# EAGLE board 32IV 6 LCD menu (EAGLE 9.7.0)

Size 138.18 x 123.5 mm. Coordinates in mm from the lower left corner, seen from the top.
Outline: 0,0 138.18,0 138.18,123.5 0,123.5 0,0
Copper layers (1*16): Top 0.035mm / dielectric 1.5mm / Bottom 0.035mm
Design rules "default": minimum track width 6mil, minimum drill 0.35mm, track to track 6mil, track to pad 6mil, pad to pad 6mil, via to via 6mil, smd to smd 6mil, copper to edge 40mil, drill to drill 6mil, minimum pad ring 10mil, minimum via ring 8mil, stop-mask expansion 4mil, vias tented up to drill 0mil, thermal gap 10mil

## Footprints (pad centres in the part's own frame; a part is rotated, then mirrored left to right if it is on the bottom)
RESAD1016W63L850D250B = drill 0.83 pad 1.43: 1 -5.08,0; 2 5.08,0
SWITCH-MOMENTARY-PTH-6.5MM = drill 1.016 pad 1.88: 1 -3.251,2.261; 2 3.251,2.261; 3 -3.251,-2.261; 4 3.251,-2.261
JHD-162A = drill 1.016 long: 1 -19.05,0; 2 -16.51,0; 3 -13.97,0; 4 -11.43,0; 5 -8.89,0; 6 -6.35,0; 7 -3.81,0; 8 -1.27,0; 9 1.27,0; 10 3.81,0; 11 6.35,0; 12 8.89,0; 13 11.43,0; 14 13.97,0; 15 16.51,0; 16 19.05,0
ARDUINO-UNO-R3-SHIELD = drill 1.016 pad 1.88: 3.3V 24.13,-2.54; 5V 24.13,0; A0 24.13,12.7; A1 24.13,15.24; A2 24.13,17.78; A3 24.13,20.32; A4 24.13,22.86; A5 24.13,25.4; AREF -24.13,-13.97; D2 -24.13,20.32; D3 -24.13,17.78; D4 -24.13,15.24; D5 -24.13,12.7; D6 -24.13,10.16; D7 -24.13,7.62; D8 -24.13,3.81; D9 -24.13,1.27; D10 -24.13,-1.27; D11 -24.13,-3.81; D12 -24.13,-6.35; D13 -24.13,-8.89; GND@0 24.13,2.54; GND@1 24.13,5.08; GND@2 -24.13,-11.43; IOREF 24.13,-7.62; NC 24.13,-10.16; RES 24.13,-5.08; RX -24.13,25.4; SCL -24.13,-19.05; SDA -24.13,-16.51; TX -24.13,22.86; VIN 24.13,7.62

## Placement (x,y rotation side)
R1  220  [RESAD1016W63L850D250B]  79.44,114.53 90 top
R2  220  [RESAD1016W63L850D250B]  129.21,45.38 0 top
R3  220  [RESAD1016W63L850D250B]  129.21,35.22 0 top
R4  220  [RESAD1016W63L850D250B]  129.21,25.06 0 top
R5  220  [RESAD1016W63L850D250B]  129.21,14.9 0 top
S1  SWITCH_MOMENTARY  [SWITCH-MOMENTARY-PTH-6.5MM]  110.16,42.84 0 top
S2  SWITCH_MOMENTARY  [SWITCH-MOMENTARY-PTH-6.5MM]  110.16,32.68 0 top
S3  SWITCH_MOMENTARY  [SWITCH-MOMENTARY-PTH-6.5MM]  110.16,22.52 0 top
S4  SWITCH_MOMENTARY  [SWITCH-MOMENTARY-PTH-6.5MM]  110.16,12.36 0 top
U3  LCD-16X2JHD-162A  [JHD-162A]  60.39,99.41 0 top
U8  ARDUINO-UNO-R3-SHIELD  [ARDUINO-UNO-R3-SHIELD]  47.88,29.84 270 top

## Library data of the parts
R1-R5 S1-S4 U3 U8 = Tinkercad

## Nets
U3_LED-: R1.1 U3.16
U8_5V: S1.3 S1.4 S2.3 S2.4 S3.3 S3.4 S4.3 S4.4 U3.2 U3.15 U8.5V
U8_D4: R5.1 S4.1 S4.2 U8.D4
U8_D5: R4.1 S3.1 S3.2 U8.D5
U8_D6: R3.1 S2.1 S2.2 U8.D6
U8_D7: R2.1 S1.1 S1.2 U8.D7
U8_D8: U3.14 U8.D8
U8_D9: U3.13 U8.D9
U8_D10: U3.12 U8.D10
U8_D11: U3.11 U8.D11
U8_D12: U3.6 U8.D12
U8_D13: U3.4 U8.D13
U8_GND: R1.2 R2.2 R3.2 R4.2 R5.2 U3.1 U3.3 U3.5 U8.GND@0 U8.GND@1 U8.GND@2

## Tracks (layer width: path | path; a pad name or v marks a point on that pad's centre or on a via)
U3_LED-  (1 unrouted)
U8_5V  (10 unrouted)
U8_D4  (3 unrouted)
U8_D5  (3 unrouted)
U8_D6  (3 unrouted)
U8_D7  (3 unrouted)
U8_D8  (1 unrouted)
U8_D9  (1 unrouted)
U8_D10  (1 unrouted)
U8_D11  (1 unrouted)
U8_D12  (1 unrouted)
U8_D13  (1 unrouted)
U8_GND  (10 unrouted)